# Altium PCB PCB1.PcbDoc
Units mil, origin at the board's own origin, x right, y up, seen from the top; angles counter-clockwise.
Board outline 3050 x 2100 mil, 2 copper layers (Top Layer, Bottom Layer); 7 components, 39 nets, 93 pads, 6 vias.
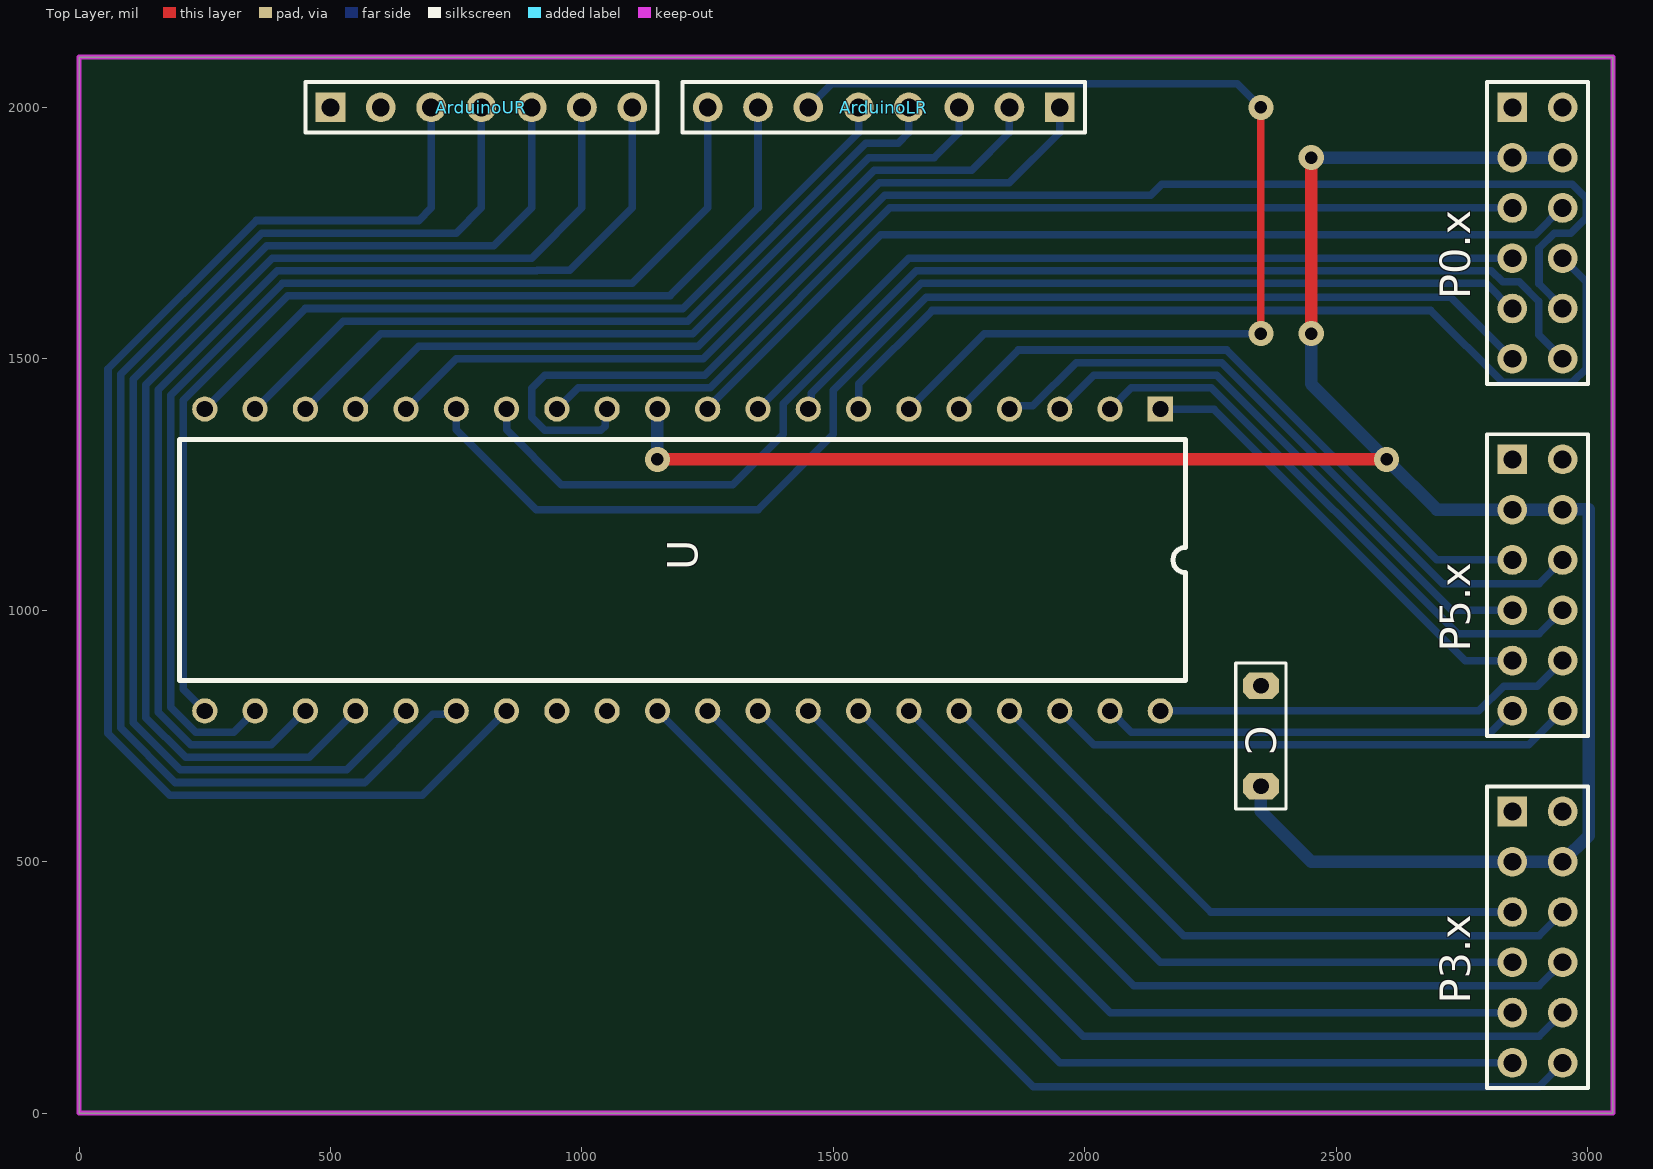
[diagram p0: Top Layer view]
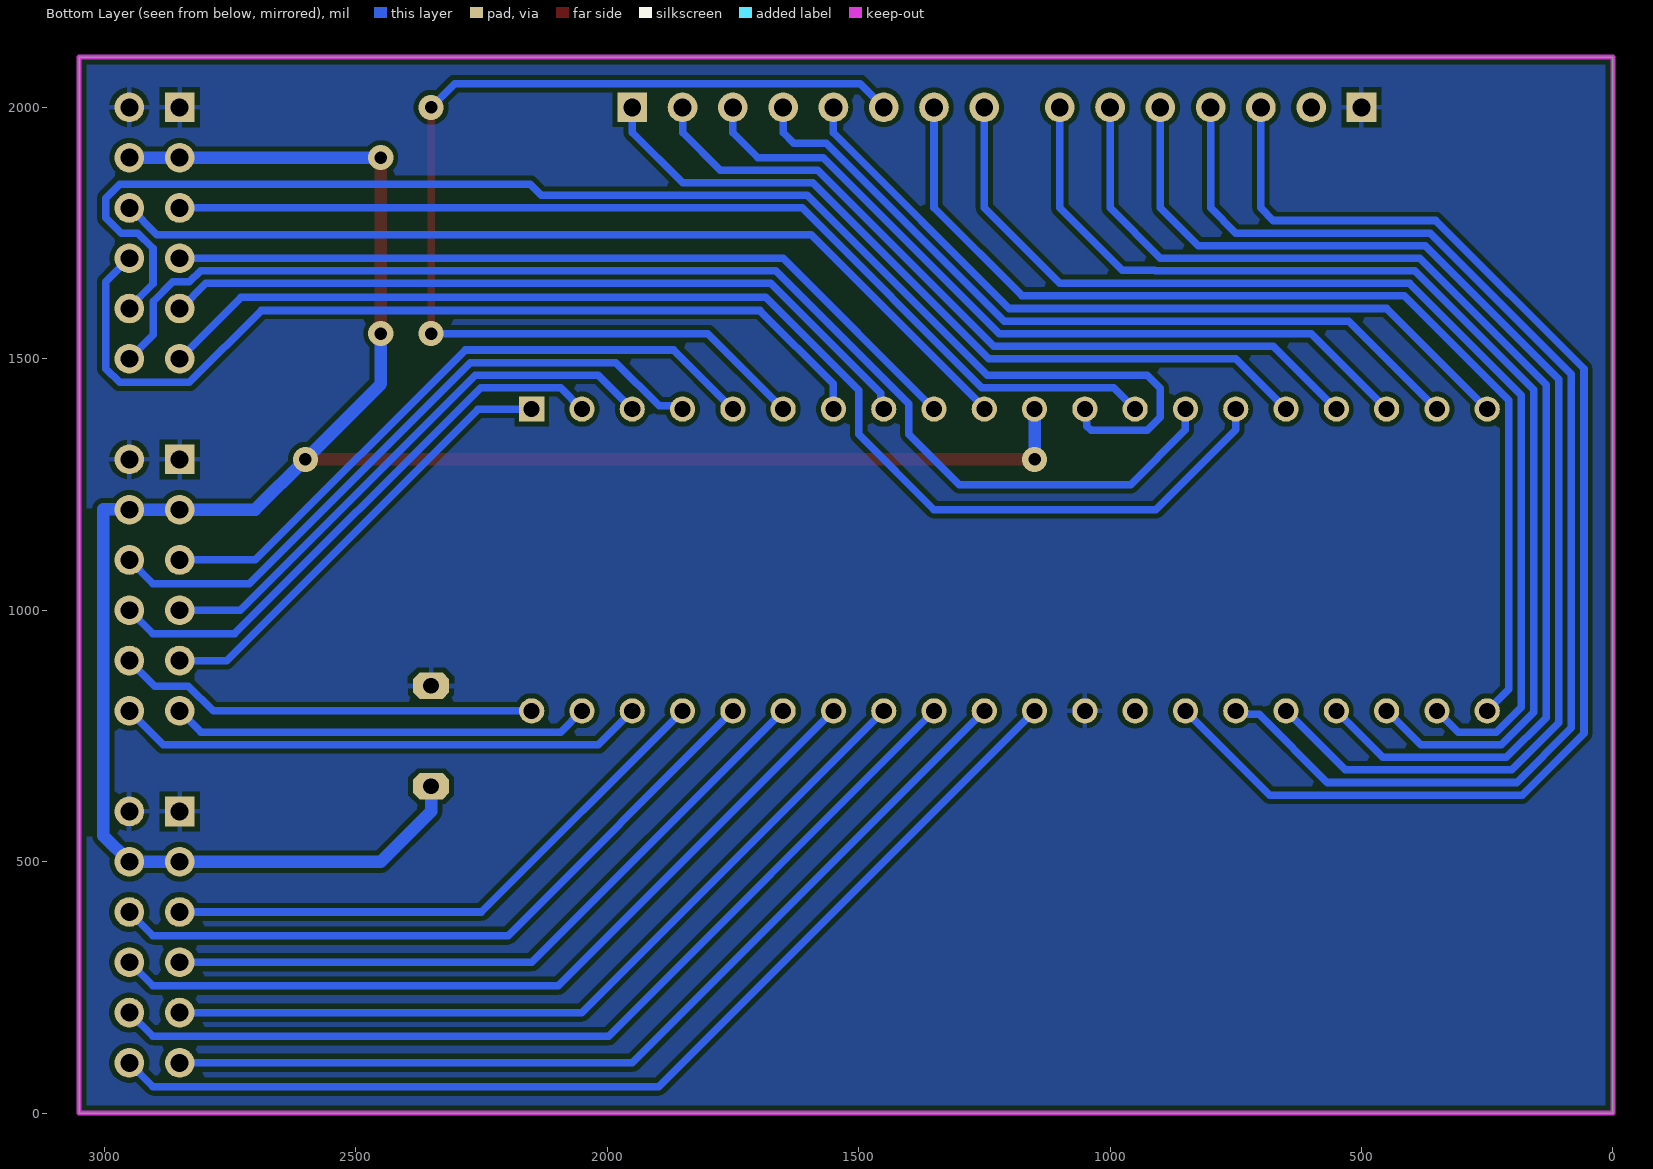
[diagram p1: Bottom Layer view, seen from below]

## Layer stack, top to bottom
Top Solder: solder mask 0.4, Solder Resist, Dk 3.5
Top Layer: signal copper 1.4
Dielectric 1: dielectric 12.6, FR-4, Dk 4.8
Bottom Layer: signal copper 1.4
Bottom Solder: solder mask 0.4, Solder Resist, Dk 3.5

## Board outline
0,0 0,2100 3050,2100 3050,0

## Design rules (kind name [scope] priority, off if disabled: settings)
Clearance [All] p1: gap=10 ignorepadtopadclearanceinfootprint=FALSE
PolygonConnect [All] p1: connectstyle=Relief reliefconductorwidth=10 reliefentries=4 polygonreliefangle="90 Angle" airgapwidth=10
RoutingVias [All] p1: holewidth=28 width=50 viastyle="Through Hole" minholewidth=28 minwidth=50 maxholewidth=28 maxwidth=50
SolderMaskExpansion [All] p1: expansion=4 istentingtop=FALSE
SupplyNets "Schematic Supply Nets_2" [InNet('GND')] p1: voltage=0.000
SupplyNets "Schematic Supply Nets_1" [InNet('VCC')] p2: voltage=0.000
Width [All] p1: maxlimit=100 minlimit=10 preferedwidth=20 minimp=50.000000 maximp=50.000000 favimp=50.000000
30 further rules are at their usual default settings.

## Components (designator, comment, footprint, x,y, rotation, side; value= is the part's Value field where it differs from the comment)
ArduinoLR "Header 8" HDR1X8 1950,2000 r180 top
ArduinoUR "Header 7" HDR1X7 500,2000 r0 top
C "100nF" C_RM2-025X075 2350,850 r270 top
P0.x "Header 6X2" HDR2X6 2850,2000 r270 top
P3.x "Header 6X2" HDR2X6 2850,600 r270 top
P5.x "Header 6X2" HDR2X6 2850,1300 r270 top
U "Zilog Z80" Z80 2150,1400 r270 top

## Footprints (in the part's own frame and the unit in brackets; to place one, negate y for a bottom-side part, rotate by r counter-clockwise, add the part's x,y. Pads: shape width x height; smd on the part's side, far side on the other; paste and mask are expansions set on the pad)
C_RM2-025X075 [mil] "RM2, outline 2.5 x 7.5 mm"
  oct 52x72 hole 31.5: 1(0,0) 2(200,0)
  silkscreen extent -45,-50 245,50
HDR1X7 [mm] "Connector; Header; 7 Position"
  rect 1.5x1.5 hole 0.9: 1(0,0)
  round 1.5 hole 0.9: 2(2.54,0) 3(5.08,0) 4(7.62,0) 5(10.16,0) 6(12.7,0) 7(15.24,0)
  silkscreen extent -1.27,-1.27 16.51,1.27
HDR1X8 [mm] "Connector; Header; 8 Position"
  rect 1.5x1.5 hole 0.9: 1(0,0)
  round 1.5 hole 0.9: 2(2.54,0) 3(5.08,0) 4(7.62,0) 5(10.16,0) 6(12.7,0) 7(15.24,0) 8(17.78,0)
  silkscreen extent -1.27,-1.27 19.05,1.27
HDR2X6 [mm] "Connector; Header; 6x2 Position"
  rect 1.5x1.5 hole 0.9: 1(0,0)
  round 1.5 hole 0.9: 2(0,2.54) 3(2.54,0) 4(2.54,2.54) 5(5.08,0) 6(5.08,2.54) 7(7.62,0) 8(7.62,2.54) 9(10.16,0) 10(10.16,2.54) 11(12.7,0) 12(12.7,2.54)
  silkscreen extent -1.27,-1.27 13.97,3.81
Z80 [mil]
  rect 50x50 hole 32: 1(0,0)
  round 50 hole 32: 2(0,-100) 3(0,-200) 4(0,-300) 5(0,-400) 6(0,-500) 7(0,-600) 8(0,-700) 9(0,-800) 10(0,-900) 11(0,-1000) 12(0,-1100) 13(0,-1200) 14(0,-1300) 15(0,-1400) 16(0,-1500) 17(0,-1600) 18(0,-1700) 19(0,-1800) 20(0,-1900) 21(600,-1900) 22(600,-1800) 23(600,-1700) 24(600,-1600) 25(600,-1500) 26(600,-1400) 27(600,-1300) 28(600,-1200) 29(600,-1100) 30(600,-1000) 31(600,-900) 32(600,-800) 33(600,-700) 34(600,-600) 35(600,-500) 36(600,-400) 37(600,-300) 38(600,-200) 39(600,-100) 40(600,0)
  silkscreen extent 60,-1950 540,50

## Part data
ArduinoLR: "Header, 8-Pin", LatestRevisionDate=17-Jul-2002, LatestRevisionNote="Re-released for DXP Platform.", Publisher="Altium Limited"
ArduinoUR: "Header, 7-Pin", LatestRevisionDate=17-Jul-2002, LatestRevisionNote="Re-released for DXP Platform.", Publisher="Altium Limited"
C: library part C, "Capacitor", Rated Voltage=50V, LatestRevisionDate=07-Sep-2019, Published=21-Feb-2011, Usage="only permitted for non-commercial purposes at HTL I Innsbruck"
P0.x P3.x P5.x: "Header, 6-Pin, Dual row", LatestRevisionDate=17-Jul-2002, LatestRevisionNote="Re-released for DXP Platform.", Publisher="Altium Limited"
U: "https://www.zilog.com/docs/z80/um0080.pdf"

## Via types
v1: diameter 50, hole 25, Top Layer to Bottom Layer, 6 vias

## Nets (pads, with @x,y where several pads share a name; then routed paths per layer and width w, separated by ;. In a path a pad name is that pad's centre, name@x,y a point inside that pad or via, vN(x,y) a via of type N, cw(c..) or ccw(c..) an arc to the next point about the centre after c; other vN are vias at no path point)
Addr_0: P3.x.12 U.30 | length 2128.9
  Bottom Layer w15: U.30 1897.03,52.97 2902.97,52.97 P3.x.12
Addr_1: P3.x.11 U.31 | length 1889.9
  Bottom Layer w15: U.31 1950,100 P3.x.11
Addr_2: P3.x.10 U.32 | length 1887.5
  Bottom Layer w15: U.32 1997.03,152.97 2902.97,152.97 P3.x.10
Addr_3: P3.x.9 U.33 | length 1648.5
  Bottom Layer w15: U.33 2050,200 P3.x.9
Addr_4: P3.x.8 U.34 | length 1646.1
  Bottom Layer w15: U.34 2097.03,252.97 2902.97,252.97 P3.x.8
Addr_5: P3.x.7 U.35 | length 1407.1
  Bottom Layer w15: U.35 2150,300 P3.x.7
Addr_6: P3.x.6 U.36 | length 1404.6
  Bottom Layer w15: U.36 2197.03,352.97 2902.97,352.97 P3.x.6
Addr_7: P3.x.5 U.37 | length 1165.7
  Bottom Layer w15: U.37 2250,400 P3.x.5
Addr_8: P5.x.12 U.38 | length 1055.9
  Bottom Layer w15: U.38 2017.5,732.5 2882.5,732.5 P5.x.12
Addr_9: P5.x.11 U.39 | length 835.2
  Bottom Layer w15: U.39 2092.5,757.5 2807.5,757.5 P5.x.11
Addr_10: P5.x.10 U.40 | length 841.4
  Bottom Layer w15: U.40 2783.49,800 2832.63,849.13 2899.13,849.13 P5.x.10
Addr_11: P5.x.9 U.1 | length 907.1
  Bottom Layer w15: U.1 2256.7,1400 2756.7,900 P5.x.9
Addr_12: P5.x.8 U.2 | length 1139.9
  Bottom Layer w15: U.2 2092.5,1442.5 2251.43,1442.5 2740.96,952.97 2902.97,952.97 P5.x.8
Addr_13: P5.x.7 U.3 | length 1121.6
  Bottom Layer w15: U.3 2017.5,1467.5 2261.79,1467.5 2729.29,1000 P5.x.7
Addr_14: P5.x.6 U.4 | length 1339.9
  Bottom Layer w15: U.4 1856.7,1406.7 1896.59,1406.7 1982.4,1492.5 2272.14,1492.5 2711.67,1052.97 2902.97,1052.97 P5.x.6
Addr_15: P5.x.5 U.5 | length 1321.6
  Bottom Layer w15: U.5 1867.5,1517.5 2282.5,1517.5 2700,1100 P5.x.5
BUSACK: ArduinoUR.7 U.23 | length 2280.8
  Bottom Layer w15: U.23 382.5,732.5 222.04,732.5 157.5,797.04 157.5,1438.31 394.19,1675 910.36,1675 911.35,1675.99 975.99,1675.99 1100,1800 ArduinoUR.7
BUSRQ: ArduinoUR.5 U.25 | length 2446.5
  Bottom Layer w15: U.25 532.5,682.5 201.33,682.5 107.5,776.33 107.5,1459.03 373.47,1725 825,1725 900,1800 ArduinoUR.5
Clock: ArduinoLR.6 U.6 | length 2151.1
  Top Layer w15: v1(2350,1550) v1(2350,2000)
  Bottom Layer w15: ArduinoLR.6 1497.03,2047.03 2302.97,2047.03 v1(2350,2000) ; U.6 1800,1550 v1(2350,1550)
Data_0: P0.x.12 U.14 | length 2509.2
  Bottom Layer w15: U.14 850,1358.79 958.79,1250 1300,1250 1400,1350 1400,1410.53 1664.47,1675 2808.49,1675 2830.52,1652.97 2863.53,1652.97 2902.55,1613.95 2902.55,1547.45 P0.x.12
Data_1: P0.x.11 U.15 | length 2483.7
  Bottom Layer w15: U.15 750,1358.79 908.79,1200 1350,1200 1500,1350 1500,1437.71 1684.31,1622.02 2727.98,1622.02 P0.x.11
Data_2: P0.x.10 U.12 | length 2827.4
  Bottom Layer w15: U.12 1046.54,1396.54 1046.54,1366.29 1037.75,1357.5 926.29,1357.5 900,1383.79 900,1441.21 926.29,1467.5 1244.28,1467.5 1601.78,1825 2131.17,1825 2153.2,1847.03 2969.48,1847.03 2997.03,1819.48 2997.03,1780.52 2966.51,1750 2933.49,1750 2902.97,1719.48 2902.97,1648.89 2950,1601.86 P0.x.10
Data_3: P0.x.9 U.8 | length 1538.9
  Bottom Layer w15: U.8 1456.09,1406.09 1456.09,1431.09 1675,1650 2798.14,1650 2848.14,1600 P0.x.9
Data_4: P0.x.8 U.7 | length 1867.1
  Bottom Layer w15: U.7 1550,1450 1696.04,1596.04 2687.45,1596.04 2830.52,1452.97 2969.48,1452.97 2997.03,1480.52 2997.03,1652.97 P0.x.8
Data_5: P0.x.7 U.9 | length 1624.3
  Bottom Layer w15: U.9 1650,1700 P0.x.7
Data_6: P0.x.6 U.10 | length 1867.2
  Bottom Layer w15: U.10 1250,1402.51 1594.51,1747.03 2895.17,1747.03 2948.14,1800 P0.x.6
Data_7: P0.x.5 U.13 | length 2065.7
  Bottom Layer w15: U.13 992.5,1442.5 1254.63,1442.5 1612.13,1800 P0.x.5
GND: ArduinoUR.1 C.1 P0.x.1 P0.x.2 P3.x.1 P3.x.2 P5.x.1 P5.x.2 U.29
HALT: ArduinoLR.3 U.18 | length 1577.8
  Bottom Layer w15: U.18 600,1550 1220.71,1550 1570.71,1900 1700,1900 1750,1950 ArduinoLR.3
INT: ArduinoLR.1 U.16 | length 1577.8
  Bottom Layer w15: U.16 750,1500 1241.42,1500 1591.42,1850 1850,1850 1950,1950 ArduinoLR.1
IOREQ: ArduinoLR.5 U.20 | length 1577.8
  Bottom Layer w15: U.20 450,1600 1200,1600 1550,1950 ArduinoLR.5
M1: ArduinoUR.3 U.27 | length 2612.2
  Bottom Layer w15: ArduinoUR.3 700,1800 675,1775 352.76,1775 57.5,1479.74 57.5,755.62 180.62,632.5 682.5,632.5 U.27
MREQ: ArduinoLR.4 U.19 | length 1577.8
  Bottom Layer w15: U.19 525,1575 1210.36,1575 1564.3,1928.94 1628.94,1928.94 1650,1950 ArduinoLR.4
NMI: ArduinoLR.2 U.17 | length 1577.8
  Bottom Layer w15: U.17 675,1525 1231.07,1525 1581.07,1875 1775,1875 1850,1950 ArduinoLR.2
Read: ArduinoLR.7 U.21 | length 2136.1
  Bottom Layer w15: U.21 207.5,842.5 207.5,1417.6 414.9,1625 1175,1625 1350,1800 ArduinoLR.7
Reset: ArduinoUR.4 U.26 | length 2529.3
  Bottom Layer w15: U.26 743.3,793.3 703.41,793.3 567.6,657.5 190.97,657.5 82.5,765.97 82.5,1469.38 363.12,1750 750,1750 800,1800 ArduinoUR.4
VCC: C.2 P0.x.3 P0.x.4 P3.x.3 P3.x.4 P5.x.3 P5.x.4 U.11 | length 4569.8
  Top Layer w25: v1(1150,1300) v1(2600,1300) ; v1(2450,1550) v1(2450,1900)
  Bottom Layer w25: v1(1150,1300) U.11 ; C.2 2350,600 2450,500 P3.x.3 P3.x.4 3002.03,552.03 3002.03,1200.89 2950.89,1200.89 P5.x.4 P5.x.3 2700,1200 v1(2600,1300) 2450,1450 v1(2450,1550) ; v1(2450,1900) P0.x.3 P0.x.4
WAIT: ArduinoUR.6 U.24 | length 2363.6
  Bottom Layer w15: U.24 457.5,707.5 211.69,707.5 132.5,786.69 132.5,1448.67 383.83,1700 900,1700 1000,1800 ArduinoUR.6
Write: ArduinoLR.8 U.22 | length 2247.9
  Bottom Layer w15: U.22 307.5,757.5 232.4,757.5 182.5,807.4 182.5,1427.96 404.54,1650 1100,1650 1250,1800 ArduinoLR.8
pads on no net: ArduinoUR.2 U.28

## Polygon pours and split planes (outlines as drawn)
GND on Bottom Layer "GND_L02_P000" (solid, remove dead copper, pour order 0): 0,2100 3050,2100 3050,0 0,0

## Keep-outs
Keep-Out Layer:
  the board outline again, w10